# EAGLE board Main Board Schematic 2 v46 (EAGLE 9.7.0)
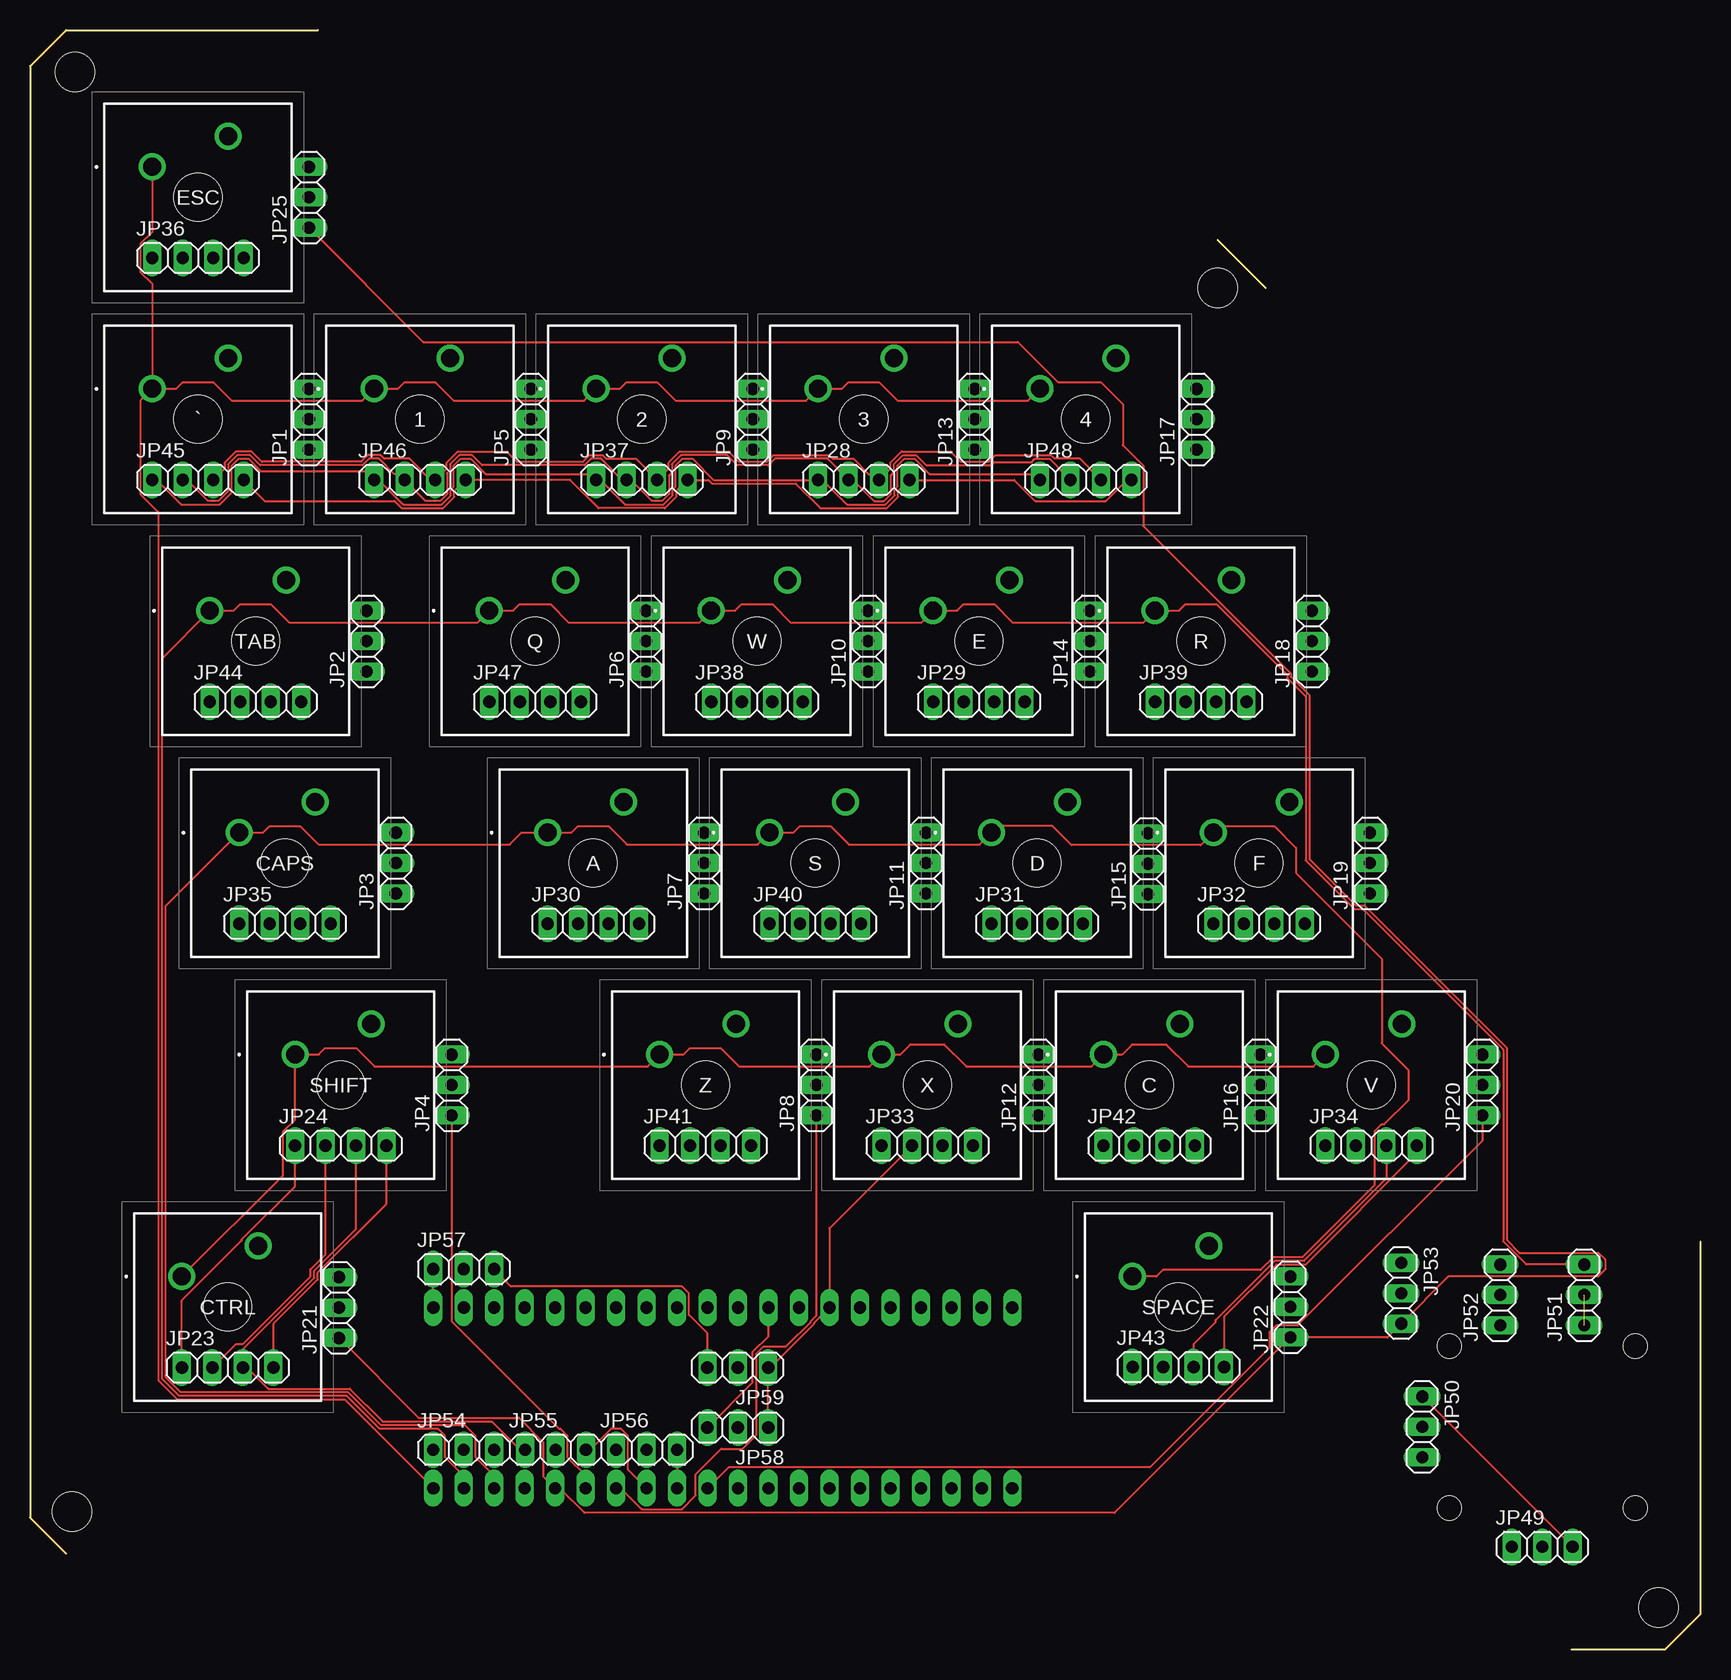
[diagram p0: board, top side]
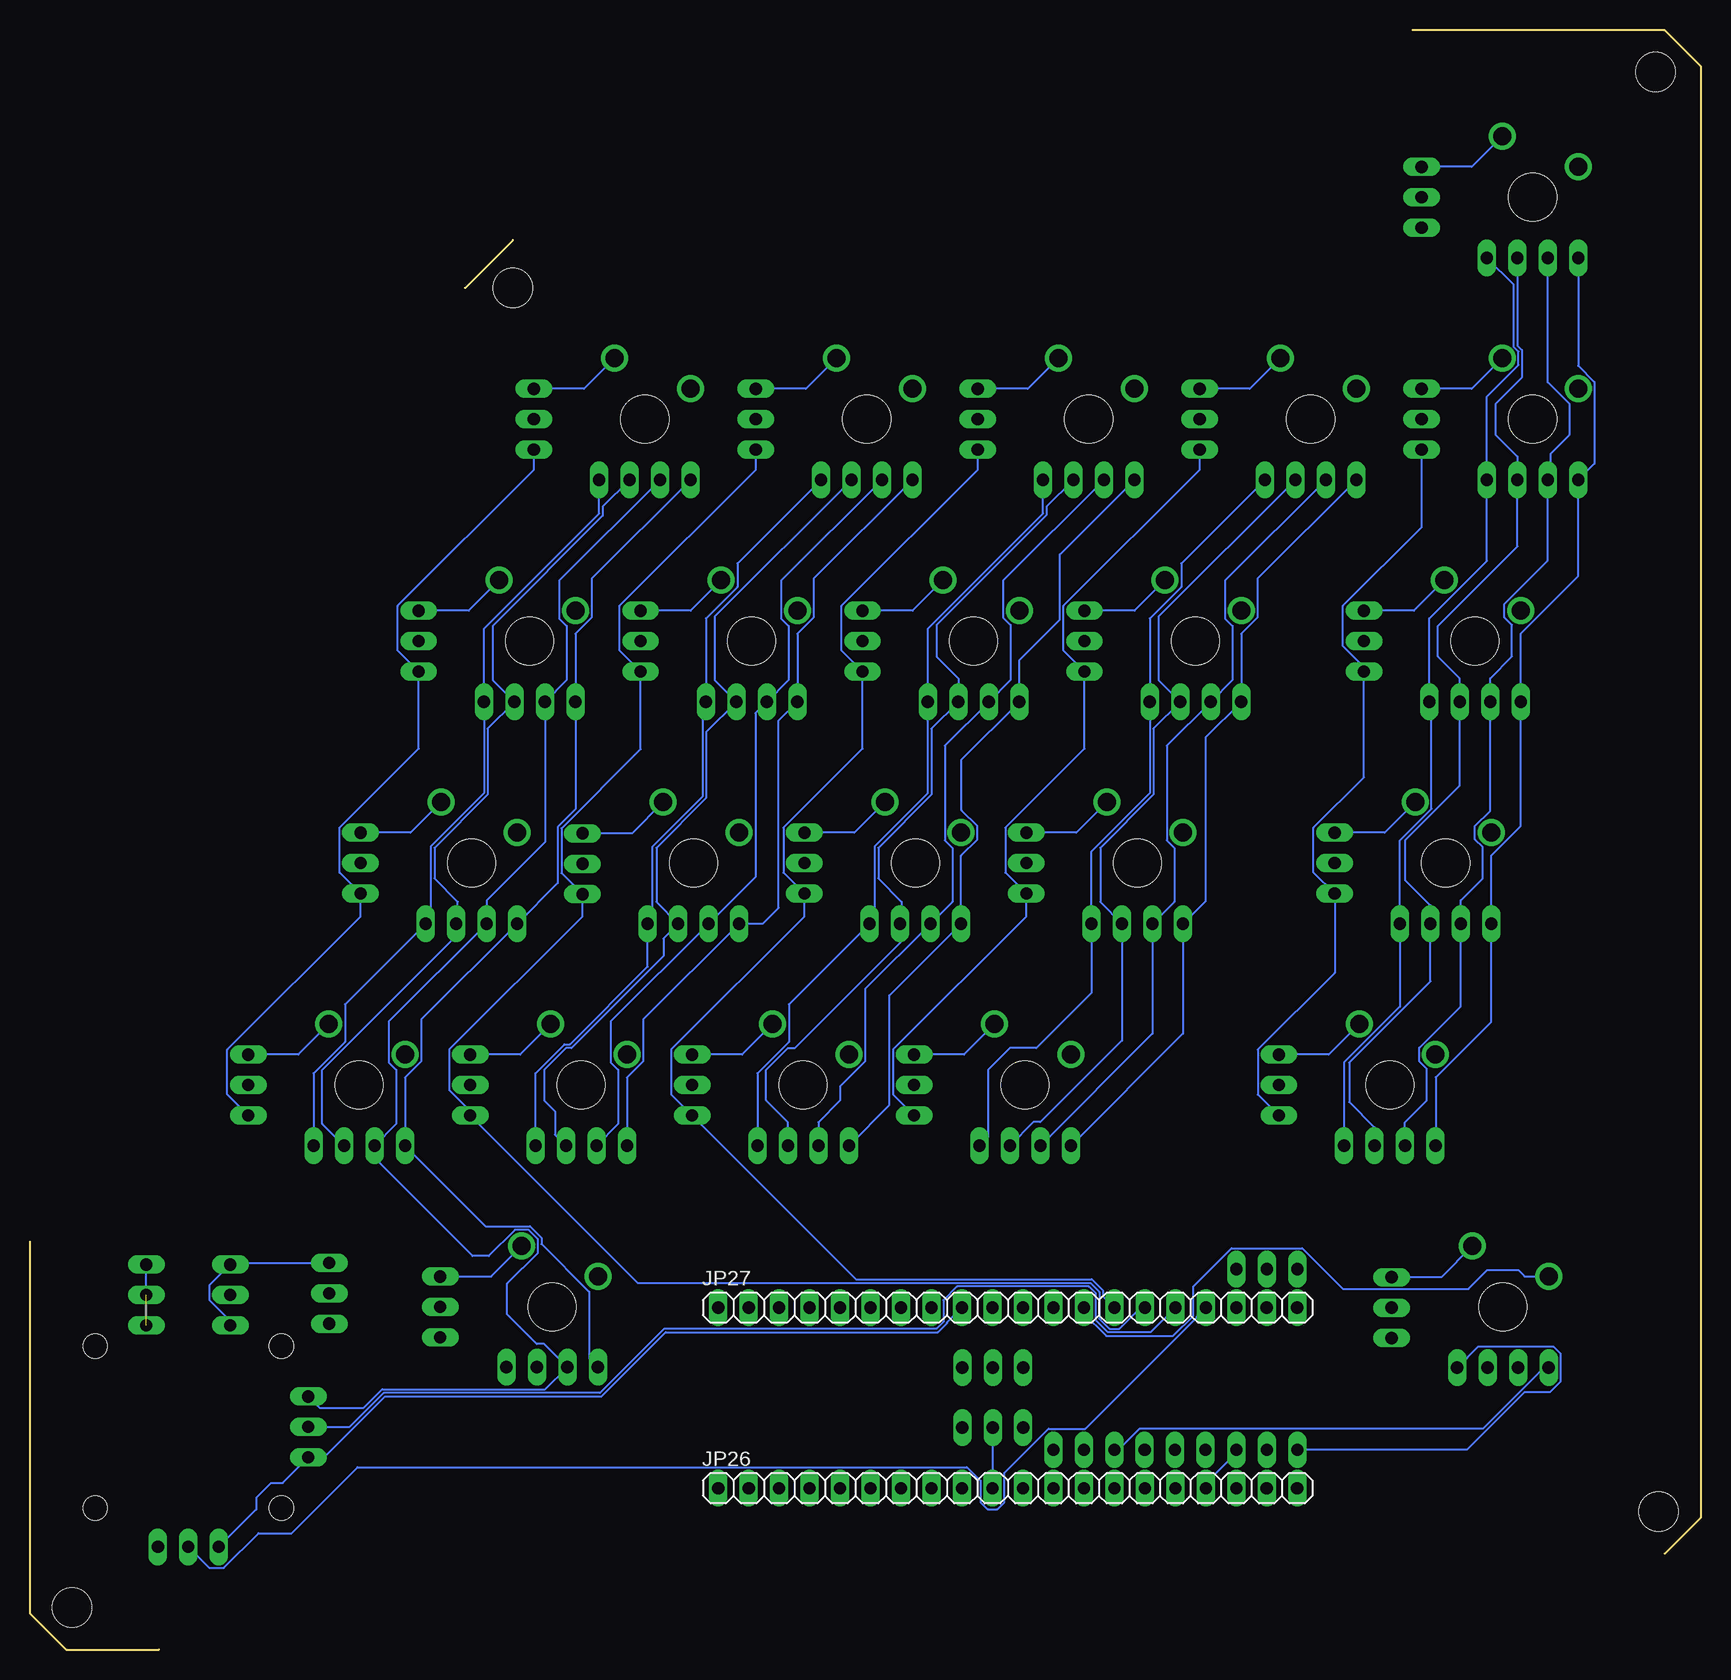
[diagram p1: board, bottom side, seen from below]

Size 139.25 x 135 mm. Coordinates in mm from the lower left corner, seen from the top.
Outline: 24,135 3,135 0,132 0,11 3,8
Outline: 103,113.5 99,117.5
Outline: 139.25,34 139.25,3 136.25,0 128.5,0
Copper layers (1*16): Top / Bottom
Stack-up Default Layer Stack: Top User Defined 0.035mm / Dielectric-1 User Defined 1.5mm / Bottom User Defined 0.035mm
Design rules "default": minimum track width 6mil, minimum drill 0.35mm, track to track 6mil, track to pad 6mil, pad to pad 6mil, via to via 6mil, smd to smd 6mil, copper to edge 40mil, drill to drill 6mil, minimum pad ring 10mil, minimum via ring 8mil, stop-mask expansion 4mil, vias tented up to drill 0mil, thermal gap 10mil
Holes 2 mm at 118.3,25.3 133.8,25.3 133.8,11.8 118.3,11.8
Holes 3.25 mm at 3.75,131.5 3.5,11.5 135.75,3.5 99,113.5

## Footprints (pad centres in the part's own frame; a part is rotated, then mirrored left to right if it is on the bottom)
MX1AE1NW = drill 1.499 pad 2.248: 1 0,0; 2 6.35,2.54 | hole 3.988: 3.81,-2.54
1X03 = drill 1.016 long: 1 -2.54,0; 2 0,0; 3 2.54,0
1X04 = drill 1.016 long: 1 -3.81,0; 2 -1.27,0; 3 1.27,0; 4 3.81,0
1X20 = drill 1.016 long: 1 -24.13,0; 2 -21.59,0; 3 -19.05,0; 4 -16.51,0; 5 -13.97,0; 6 -11.43,0; 7 -8.89,0; 8 -6.35,0; 9 -3.81,0; 10 -1.27,0; 11 1.27,0; 12 3.81,0; 13 6.35,0; 14 8.89,0; 15 11.43,0; 16 13.97,0; 17 16.51,0; 18 19.05,0; 19 21.59,0; 20 24.13,0

## Placement (x,y rotation side)
1  MX1A-E1NW  [MX1AE1NW]  28.69,105.09 0 top
2  MX1A-E1NW  [MX1AE1NW]  47.19,105.09 0 top
3  MX1A-E1NW  [MX1AE1NW]  65.69,105.09 0 top
4  MX1A-E1NW  [MX1AE1NW]  84.19,105.09 0 top
`  MX1A-E1NW  [MX1AE1NW]  10.19,105.09 0 top
A  MX1A-E1NW  [MX1AE1NW]  43.14,68.09 0 top
C  MX1A-E1NW  [MX1AE1NW]  89.49,49.59 0 top
CAPS  MX1A-E1NW  [MX1AE1NW]  17.44,68.09 0 top
CTRL  MX1A-E1NW  [MX1AE1NW]  12.66,31.09 0 top
D  MX1A-E1NW  [MX1AE1NW]  80.14,68.09 0 top
E  MX1A-E1NW  [MX1AE1NW]  75.29,86.59 0 top
ESC  MX1A-E1NW  [MX1AE1NW]  10.19,123.59 0 top
F  MX1A-E1NW  [MX1AE1NW]  98.64,68.09 0 top
JP1  PINHD-1X3  [1X03]  23.25,102.55 90 top
JP2  PINHD-1X3  [1X03]  28.05,84.05 90 top
JP3  PINHD-1X3  [1X03]  30.5,65.55 90 top
JP4  PINHD-1X3  [1X03]  35.15,47.05 90 top
JP5  PINHD-1X3  [1X03]  41.75,102.55 90 top
JP6  PINHD-1X3  [1X03]  51.35,84.05 90 top
JP7  PINHD-1X3  [1X03]  56.2,65.55 90 top
JP8  PINHD-1X3  [1X03]  65.55,47.05 90 top
JP9  PINHD-1X3  [1X03]  60.25,102.55 90 top
JP10  PINHD-1X3  [1X03]  69.85,84.05 90 top
JP11  PINHD-1X3  [1X03]  74.7,65.55 90 top
JP12  PINHD-1X3  [1X03]  84.05,47.05 90 top
JP13  PINHD-1X3  [1X03]  78.75,102.55 90 top
JP14  PINHD-1X3  [1X03]  88.35,84.05 90 top
JP15  PINHD-1X3  [1X03]  93.2,65.5 90 top
JP16  PINHD-1X3  [1X03]  102.55,47.05 90 top
JP17  PINHD-1X3  [1X03]  97.25,102.55 90 top
JP18  PINHD-1X3  [1X03]  106.85,84.05 90 top
JP19  PINHD-1X3  [1X03]  111.7,65.55 90 top
JP20  PINHD-1X3  [1X03]  121.05,47.05 90 top
JP21  PINHD-1X3  [1X03]  25.75,28.5 90 top
JP22  PINHD-1X3  [1X03]  105.05,28.55 90 top
JP23  PINHD-1X4  [1X04]  16.48,23.5 0 top
JP24  PINHD-1X4  [1X04]  25.9,42 0 top
JP25  PINHD-1X3  [1X03]  23.25,121.05 90 top
JP26  PINHD-1X20  [1X20]  57.75,13.45 0 bottom
JP27  PINHD-1X20  [1X20]  57.75,28.5 0 bottom
JP28  PINHD-1X4  [1X04]  69.5,97.5 0 top
JP29  PINHD-1X4  [1X04]  79.1,79 0 top
JP30  PINHD-1X4  [1X04]  46.95,60.5 0 top
JP31  PINHD-1X4  [1X04]  83.95,60.5 0 top
JP32  PINHD-1X4  [1X04]  102.45,60.5 0 top
JP33  PINHD-1X4  [1X04]  74.8,42 0 top
JP34  PINHD-1X4  [1X04]  111.8,42 0 top
JP35  PINHD-1X4  [1X04]  21.25,60.5 0 top
JP36  PINHD-1X4  [1X04]  14,116 0 top
JP37  PINHD-1X4  [1X04]  51,97.5 0 top
JP38  PINHD-1X4  [1X04]  60.6,79 0 top
JP39  PINHD-1X4  [1X04]  97.6,79 0 top
JP40  PINHD-1X4  [1X04]  65.45,60.5 0 top
JP41  PINHD-1X4  [1X04]  56.3,42 0 top
JP42  PINHD-1X4  [1X04]  93.3,42 0 top
JP43  PINHD-1X4  [1X04]  95.72,23.54 0 top
JP44  PINHD-1X4  [1X04]  18.8,79 0 top
JP45  PINHD-1X4  [1X04]  14,97.5 0 top
JP46  PINHD-1X4  [1X04]  32.5,97.5 0 top
JP47  PINHD-1X4  [1X04]  42.1,79 0 top
JP48  PINHD-1X4  [1X04]  88,97.5 0 top
JP49  PINHD-1X3  [1X03]  126.05,8.55 0 top
JP50  PINHD-1X3  [1X03]  116.05,18.55 270 top
JP51  PINHD-1X3  [1X03]  129.55,29.55 90 top
JP52  PINHD-1X3  [1X03]  122.55,29.55 90 top
JP53  PINHD-1X3  [1X03]  114.3,29.7 270 top
JP54  PINHD-1X3  [1X03]  36.15,16.65 0 top
JP55  PINHD-1X3  [1X03]  43.8,16.65 0 top
JP56  PINHD-1X3  [1X03]  51.4,16.65 0 top
JP57  PINHD-1X3  [1X03]  36.15,31.7 0 top
JP58  PINHD-1X3  [1X03]  59,18.5 180 top
JP59  PINHD-1X3  [1X03]  59,23.5 180 top
Q  MX1A-E1NW  [MX1AE1NW]  38.29,86.59 0 top
R  MX1A-E1NW  [MX1AE1NW]  93.79,86.59 0 top
S  MX1A-E1NW  [MX1AE1NW]  61.64,68.09 0 top
SHIFT  MX1A-E1NW  [MX1AE1NW]  22.09,49.59 0 top
SPACE  MX1A-E1NW  [MX1AE1NW]  91.92,31.09 0 top
TAB  MX1A-E1NW  [MX1AE1NW]  14.99,86.59 0 top
V  MX1A-E1NW  [MX1AE1NW]  107.99,49.59 0 top
W  MX1A-E1NW  [MX1AE1NW]  56.79,86.59 0 top
X  MX1A-E1NW  [MX1AE1NW]  70.99,49.59 0 top
Z  MX1A-E1NW  [MX1AE1NW]  52.49,49.59 0 top

## Library data of the parts
1-4 ` A C CAPS CTRL D E ESC F Q R S SHIFT SPACE TAB V W X Z = SamacSys_Parts; DESCRIPTION: Pushbutton Switches Full Travel, Mech. Keyswitch, Click Tactile Feel (Blue stem), 60cN, No LED, No Diode, Fixation Pins for PCB Mounting; HEIGHT: 15.2mm; MANUFACTURER_NAME: Cherry; MANUFACTURER_PART_NUMBER: MX1A-E1NW; MOUSER_PART_NUMBER: 540-MX1A-E1NW; MOUSER_PRICE-STOCK: https://www.mouser.co.uk/ProductDetail/CHERRY/MX1A-E1NW/?qs=Z7NFYKyvgJd45Wm4xzFv7w%3D%3D
JP1-JP59 = Connector; CATEGORY: CONNECTOR; SUB-CATEGORY: PIN-HEADER

## Nets
N$1: `.2 JP1.3
N$2: JP2.3 TAB.2
N$3: CAPS.2 JP3.3
N$4: JP4.3 SHIFT.2
N$5: 1.2 JP5.3
N$6: JP6.3 Q.2
N$7: A.2 JP7.3
N$8: JP8.3 Z.2
N$9: 2.2 JP9.3
N$10: JP10.3 W.2
N$11: JP11.3 S.2
N$12: JP12.3 X.2
N$13: 3.2 JP13.3
N$14: E.2 JP14.3
N$15: D.2 JP15.3
N$16: C.2 JP16.3
N$17: 4.2 JP17.3
N$18: JP18.3 R.2
N$19: F.2 JP19.3
N$20: JP20.3 V.2
N$21: CTRL.2 JP21.3
N$22: JP22.3 SPACE.2
N$23: C.1 CTRL.1 JP27.13 SHIFT.1 V.1 X.1 Z.1
N$24: A.1 CAPS.1 D.1 F.1 JP26.18 S.1 SPACE.1
N$25: ESC.2 JP25.3
N$26: E.1 JP26.19 JP51.1 JP51.2 JP51.3 Q.1 R.1 TAB.1 W.1
N$27: 1.1 2.1 3.1 4.1 `.1 ESC.1 JP26.20
N$28: JP23.2 JP24.2 JP27.7 JP28.2 JP29.2 JP30.2 JP31.2 JP32.2 JP33.2 JP34.2 JP35.2 JP36.2 JP37.2 JP38.2 JP39.2 JP40.2 JP41.2 JP42.2 JP43.2 JP44.2 JP45.2 JP46.2 JP47.2 JP48.2 JP49.3 JP50.1 JP58.1 JP59.1
N$29: JP1.1 JP2.1 JP3.1 JP4.1 JP26.15
N$30: JP9.1 JP10.1 JP11.1 JP12.1 JP27.14
N$31: JP13.1 JP14.1 JP15.1 JP16.1 JP27.15
N$32: JP17.1 JP18.1 JP19.1 JP20.1 JP26.11
N$33: JP21.1 JP22.1 JP25.1 JP26.16 JP53.3
N$34: JP52.1 JP52.3 JP53.1
N$37: JP23.4 JP24.4 JP28.4 JP29.4 JP30.4 JP31.4 JP32.4 JP33.4 JP34.4 JP35.4 JP36.4 JP37.4 JP38.4 JP39.4 JP40.4 JP41.4 JP42.4 JP43.4 JP44.4 JP45.4 JP46.4 JP47.4 JP48.4 JP54.1
N$38: JP26.17 JP54.3
N$40: JP26.13 JP55.3
N$41: JP5.1 JP6.1 JP7.1 JP8.1 JP26.14
N$42: JP26.12 JP56.3
N$43: JP23.3 JP24.3 JP28.3 JP29.3 JP30.3 JP31.3 JP32.3 JP33.3 JP34.3 JP35.3 JP36.3 JP37.3 JP38.3 JP39.3 JP40.3 JP41.3 JP42.3 JP43.3 JP44.3 JP45.3 JP46.3 JP47.3 JP48.3 JP55.1
N$44: JP23.1 JP24.1 JP28.1 JP29.1 JP30.1 JP31.1 JP32.1 JP33.1 JP34.1 JP35.1 JP36.1 JP37.1 JP38.1 JP39.1 JP40.1 JP41.1 JP42.1 JP43.1 JP44.1 JP45.1 JP46.1 JP47.1 JP48.1 JP56.1
N$58: JP27.20 JP57.1
N$59: JP57.3 JP59.3
N$61: JP26.10 JP58.2
N$62: JP27.16 JP50.2
N$63: JP27.17 JP49.2
N$65: JP27.9 JP49.1 JP50.3 JP58.3

## Tracks (layer width: path | path; a pad name or v marks a point on that pad's centre or on a via)
N$1
  Bottom 0.152: `.2 19.08,105.09 JP1.3
N$2
  Bottom 0.152: TAB.2 23.88,86.59 JP2.3
N$3
  Bottom 0.152: CAPS.2 26.33,68.09 JP3.3
N$4
  Bottom 0.152: SHIFT.2 30.98,49.59 JP4.3
N$5
  Bottom 0.152: 1.2 37.58,105.09 JP5.3
N$6
  Bottom 0.152: Q.2 47.18,86.59 JP6.3
N$7
  Bottom 0.152: A.2 52.03,68.09 JP7.3
N$8
  Bottom 0.152: Z.2 61.38,49.59 JP8.3
N$9
  Bottom 0.152: 2.2 56.08,105.09 JP9.3
N$10
  Bottom 0.152: W.2 65.68,86.59 JP10.3
N$11
  Bottom 0.152: S.2 70.53,68.09 JP11.3
N$12
  Bottom 0.152: X.2 79.88,49.59 JP12.3
N$13
  Bottom 0.152: 3.2 74.58,105.09 JP13.3
N$14
  Bottom 0.152: E.2 84.18,86.59 JP14.3
N$15
  Bottom 0.152: D.2 89.08,68.04 JP15.3
N$16
  Bottom 0.152: C.2 98.38,49.59 JP16.3
N$17
  Bottom 0.152: 4.2 93.08,105.09 JP17.3
N$18
  Bottom 0.152: R.2 102.68,86.59 JP18.3
N$19
  Bottom 0.152: F.2 107.53,68.09 JP19.3
N$20
  Bottom 0.152: V.2 116.88,49.59 JP20.3
N$21
  Bottom 0.152: CTRL.2 21.61,31.04 JP21.3
N$22
  Bottom 0.152: SPACE.2 100.81,31.09 JP22.3
N$23
  Top 0.152: V.1 107,48.6 96.55,48.6 94.7,50.44 91.89,50.44 91.05,49.59 C.1 88.5,48.6 78.05,48.6 76.2,50.44 73.39,50.44 72.55,49.59 X.1 70,48.6 59.11,48.6 57.58,50.14 55.02,50.14 54.48,49.59 Z.1 51.5,48.6 28.72,48.6 27.18,50.14 24.62,50.14 24.08,49.59 SHIFT.1 22.09,44.16 21.1,43.17 21.1,39.52 CTRL.1
  Bottom 0.152: CTRL.1 14.65,31.09 15.2,31.64 17.75,31.64 19.34,30.05 29.8,30.05 33.2,33.45 39.1,33.45 42.29,30.26 42.29,27.83 43.98,26.14 49.52,26.14 51.46,28.08 51.46,28.44 JP27.13
N$24
  Top 0.152: SPACE.1 93.9,31.09 94.45,31.64 102.57,31.64 103.62,32.69 106.06,32.69 112.08,38.71 112.08,43.17 112.66,43.75 112.87,43.75 114.89,45.77 114.89,48.33 112.68,50.53 112.68,57.58 105.54,64.73 105.54,66.83 103.73,68.64 99.22,68.64 98.68,68.09 F.1 97.6,67.05 86.81,67.05 85.23,68.64 80.72,68.64 80.18,68.09 D.1 79.15,67.1 68.27,67.1 66.73,68.64 64.17,68.64 63.63,68.09 S.1 60.65,67.1 49.77,67.1 48.23,68.64 45.67,68.64 45.13,68.09 A.1 40.99,68.09 40,67.1 24.06,67.1 22.53,68.64 19.97,68.64 19.43,68.09 CAPS.1 11.31,61.96 11.31,22.69 12.56,21.44 26.52,21.44 29.26,18.71 36.26,18.71 37.14,17.82 37.14,16.04 38.7,14.48 JP26.18
N$25
  Bottom 0.152: ESC.2 19.08,123.59 JP25.3
N$26  (1 unrouted)
  Top 0.152: JP26.19 36.16,14.48 34.6,16.04 34.6,17.82 34.02,18.4 29.13,18.4 26.39,21.14 12.43,21.14 11.01,22.56 11.01,82.61 TAB.1 16.98,86.59 17.52,87.14 20.08,87.14 21.61,85.6 37.3,85.6 Q.1 40.28,86.59 40.82,87.14 43.38,87.14 44.91,85.6 55.8,85.6 W.1 58.78,86.59 59.32,87.14 61.88,87.14 63.42,85.6 74.3,85.6 E.1 77.28,86.59 77.82,87.14 80.38,87.14 81.92,85.6 92.8,85.6 R.1 95.78,86.59 96.32,87.14 98.88,87.14 104.79,81.22 104.79,80.97 106.34,79.42 106.34,65.77 110.4,61.72 111.09,61.72 122.8,50 122.8,34 124.71,32.09 JP51.3
  Bottom 0.152: JP51.1 JP51.3
N$27
  Top 0.152: `.1 12.18,105.09 12.72,105.64 15.28,105.64 16.82,104.1 27.7,104.1 1.1 30.68,105.09 31.22,105.64 33.78,105.64 35.31,104.1 46.2,104.1 2.1 49.18,105.09 49.72,105.64 52.28,105.64 53.81,104.1 64.7,104.1 3.1 67.68,105.09 68.22,105.64 70.78,105.64 72.31,104.1 83.2,104.1 4.1 | ESC.1 10.19,118.16 9.2,117.17 9.2,114.83 10.19,113.84 `.1 | `.1 9.2,104.1 9.2,96.33 10.7,94.82 10.7,22.44 12.31,20.83 26.27,20.83 33.62,13.48 JP26.20
N$28
  Top 0.152: JP23.2 17.17,25.46 17.75,25.46 23.39,31.1 23.39,31.7 24.63,32.95 JP24.2 | JP33.2 66.64,35.11 JP27.7 65.39,27.26 65.39,27.2 61.69,23.5 JP59.1 JP58.1 | JP45.2 13.11,97.5 14.86,95.75 15.68,95.75 16.52,96.58 16.52,98.8 17.27,99.56 18.35,99.56 19.19,98.72 27.74,98.72 28.28,99.25 29.1,99.25 30.35,98 30.73,98 JP46.2 32.98,95.75 34.18,95.75 34.76,96.33 34.76,98.06 35.02,98.31 35.02,98.8 35.77,99.56 36.85,99.56 37.69,98.72 46.24,98.72 46.78,99.25 47.6,99.25 49.35,97.5 JP37.2 50.11,97.5 51.86,95.75 52.68,95.75 53.26,96.33 53.26,97.87 53.52,98.13 53.52,98.8 54.27,99.56 58.11,99.56 58.95,98.72 61.55,98.72 62.09,99.25 66.48,99.25 JP28.2 68.61,97.5 70.36,95.75 71.18,95.75 71.76,96.33 71.76,97.87 72.02,98.13 72.02,98.8 72.77,99.56 73.85,99.56 74.69,98.72 80.05,98.72 80.33,99 83.53,99 83.78,99.25 84.98,99.25 JP48.2 | 115.96,21 JP50.1 JP49.3
  Bottom 0.152: JP36.2 12.73,105.64 10.91,103.83 10.91,101.27 12.5,99.69 12.5,97.73 JP45.2 12.73,90.76 16.34,87.15 16.34,86.03 15.71,85.4 15.71,82.77 17.53,80.96 JP44.2 17.53,69.91 18.79,68.65 18.79,67.53 18.16,66.9 18.16,64.27 19.98,62.46 JP35.2 19.98,53.61 23.44,50.15 23.44,49.03 22.81,48.4 22.81,45.77 24.63,43.96 JP24.2 | JP46.2 39.64,89.09 39.64,85.96 39.01,85.33 39.01,80.82 JP47.2 44.49,75.34 44.49,67.46 43.86,66.83 43.86,62.32 JP30.2 45.68,51.35 JP41.2 | JP33.2 73.53,43.96 71.71,45.77 71.71,46.95 69.64,49.03 69.64,55.04 JP40.2 62.36,62.32 62.36,66.83 62.99,67.46 62.99,75.34 JP38.2 57.51,80.82 57.51,85.4 58.14,86.03 58.14,89.09 JP37.2 | JP28.2 76.64,89.09 76.64,85.96 76.01,85.33 76.01,80.82 JP29.2 78.79,78.04 78.79,64.39 JP31.2 90.84,52.34 90.84,48.96 90.21,48.33 90.21,43.82 JP42.2 | JP48.2 95.14,89.09 95.14,85.96 94.51,85.33 94.51,80.82 JP39.2 96.33,67.31 101.18,62.46 JP32.2 109.34,52.34 109.34,48.96 108.71,48.33 108.71,43.82 JP34.2 110.53,40.98 102.36,32.81 101,32.81 98.83,34.98 97.7,34.98 96.91,34.19 96.91,33.07 99.46,30.52 99.46,27.92 97,25.46 96.38,25.46 JP43.2 96.3,21.7 109.89,21.7 111.44,20.15 115.11,20.15 JP50.1
N$29
  Top 0.152: JP26.15 46.32,14.51 44.79,16.04 44.79,17.82 44.21,18.4 44.09,18.4 35.15,27.35 JP4.1
  Bottom 0.152: JP4.1 36.9,46.26 36.9,50 30.5,56.4 JP3.1 32.25,64.76 32.25,68.5 28.05,72.7 JP2.1 28.05,81.89 29.8,83.64 29.8,87 23.25,93.55 JP1.1
N$30
  Bottom 0.152: JP27.14 49.8,29.44 49.8,29.92 50.74,30.86 70.4,30.86 JP12.1 85.8,46.26 85.8,50 74.7,61.1 JP11.1 76.45,64.76 76.45,68.5 69.85,75.1 JP10.1 71.6,83.26 71.6,87 60.25,98.35 JP9.1
N$31
  Bottom 0.152: JP27.15 46.7,28.5 48.45,26.75 49.27,26.75 50.1,27.58 50.1,29.8 50.86,30.56 88.6,30.56 JP16.1 102.55,44.89 104.3,46.64 104.3,50 93.2,61.1 JP15.1 94.95,64.71 94.95,68.45 88.35,75.05 JP14.1 90.1,83.26 90.1,87 78.75,98.35 JP13.1
N$32
  Top 0.152: JP26.11 58.23,15.2 93.36,15.2 103.3,25.14 103.3,26.42 103.88,27 105.66,27 121.05,42.39 JP20.1
  Bottom 0.152: JP20.1 122.8,46.26 122.8,50 111.7,61.1 JP19.1 113.45,64.76 113.45,68.5 106.85,75.1 JP18.1 108.6,83.26 108.6,87 97.25,98.35 JP17.1
N$33
  Top 0.152: JP25.1 32.78,108.98 82.35,108.98 85.7,105.64 89.28,105.64 91.09,103.83 91.09,100.39 92.8,98.67 92.8,93.64 105.1,81.35 105.1,81.1 106.65,79.55 106.65,65.9 110.53,62.02 111.22,62.02 123.11,50.13 123.11,34.13 124.15,33.08 130.72,33.08 131.3,32.5 131.3,31.68 130.72,31.1 118.24,31.1 JP53.3 113.15,26.01 JP22.1 105.03,26.01 90.41,11.39 46.21,11.39 44.16,13.45 JP26.16 42.79,14.44 42.79,17.28 40.76,19.32 32.39,19.32 JP21.1
N$34
  Bottom 0.152: JP53.1 122.4,32.24 JP52.3 124.3,30.34 124.3,29.14 122.55,27.39 JP52.1
N$37
  Top 0.152: JP24.4 29.71,37.16 24,31.45 24,30.85 20.29,27.13 JP23.4 | JP45.4 19.56,95.75 30.39,95.75 31,95.14 34.43,95.14 35.37,96.08 35.37,96.56 JP46.4 45.03,97.5 47.39,95.14 52.93,95.14 53.87,96.08 53.87,96.56 JP37.4 56.54,97.5 56.85,97.19 63.83,97.19 65.89,95.14 71.43,95.14 72.37,96.08 72.37,96.56 JP28.4 82.03,97.5 83.78,95.75 89.68,95.75 91.43,97.5 JP48.4 | JP34.4 115.62,41.98 115.62,41.39 106.32,32.08 103.88,32.08 99.53,27.74 JP43.4
  Bottom 0.152: JP24.4 29.71,48.95 25.06,53.6 JP35.4 25.06,67.45 22.44,70.07 22.44,78.69 22.61,78.86 JP44.4 22.61,85.95 17.81,90.75 JP45.4 17.81,104.45 15.19,107.07 15.19,108.19 15.57,108.58 15.57,113.76 JP36.4 | JP46.4 43.29,90.52 43.29,88.57 45.91,85.95 JP47.4 45.91,71.39 50.76,66.53 JP30.4 50.76,54.74 55.36,50.14 57.58,50.14 59.39,48.33 59.39,42.72 JP41.4 | JP33.4 78.61,48.03 75.99,50.66 75.99,53.77 JP40.4 68.84,60.92 68.84,66.95 64.41,71.39 JP38.4 64.41,85.09 54.81,94.69 JP37.4 | JP28.4 80.29,90.52 80.29,88.57 82.91,85.95 JP29.4 83.19,78.72 83.19,71.11 87.34,66.95 87.34,60.92 JP31.4 87.76,56.93 94.25,50.44 94.7,50.44 97.11,48.03 JP42.4 | JP48.4 91.81,94.69 101.41,85.09 JP39.4 101.41,71.39 105.84,66.95 105.84,60.92 JP32.4 112.99,53.77 112.99,50.66 115.61,48.03 JP34.4 | JP23.4 18.53,25.25 12.25,25.25 11.67,24.67 11.67,22.33 12.56,21.44 14.67,21.44 19.46,16.65 JP54.1
N$38
  Bottom 0.152: JP26.17 41.24,13.85 38.69,16.4 JP54.3
N$40
  Top 0.152: JP55.3 46.7,16.65 48.45,18.4 49.27,18.4 49.85,17.82 49.85,15 JP26.13
N$41
  Top 0.152: JP26.14 49.24,13.45 50.99,11.7 54.35,11.7 55.49,12.84 55.49,14.62 57.61,16.75 59.41,16.75 60.55,17.89 60.55,24.67 61.13,25.25 63.02,25.25 65.09,27.33 65.09,27.38 65.55,27.84 JP8.1
  Bottom 0.152: JP8.1 67.3,46.26 67.3,50 56.2,61.1 JP7.1 57.95,64.76 57.95,68.5 51.35,75.1 JP6.1 53.1,83.26 53.1,87 41.75,98.35 JP5.1
N$42
  Top 0.152: JP56.3 JP26.12
N$43
  Top 0.152: JP24.3 27.17,35.05 23.69,31.58 23.69,30.97 17.75,25.02 JP23.3 18.12,23.5 19.88,21.75 26.65,21.75 29.38,19.01 38.49,19.01 40.85,16.65 JP55.1 | JP45.3 16.21,98.44 16.21,98.92 17.15,99.86 18.47,99.86 19.32,99.02 27.62,99.02 28.15,99.56 29.23,99.56 29.53,99.25 31.64,99.25 33.39,97.5 JP46.3 34.71,98.44 34.71,98.92 35.65,99.86 39.73,99.86 40.58,99.02 46.12,99.02 46.65,99.56 47.73,99.56 48.03,99.25 50.52,99.25 JP37.3 53.21,98.44 53.21,98.92 54.15,99.86 58.23,99.86 59.08,99.02 61.42,99.02 61.96,99.56 66.6,99.56 66.91,99.25 68.64,99.25 69.89,98 70.27,98 JP28.3 71.71,98.44 71.71,98.92 72.65,99.86 76.73,99.86 77.58,99.02 79.92,99.02 80.46,99.56 85.1,99.56 85.36,99.31 87.47,99.31 JP48.3 | JP34.3 113.07,39.27 106.19,32.38 103.75,32.38 98.81,27.45 98.81,27.27 97,25.45 JP43.3
  Bottom 0.152: JP24.3 27.17,43.52 29.29,45.65 29.29,48.94 22.52,55.71 JP35.3 22.52,62.03 24.64,64.14 24.64,67.44 20.07,72.01 JP44.3 20.07,80.96 21.89,82.77 21.89,85.33 15.27,91.94 JP45.3 15.27,99.46 17.09,101.27 17.09,103.83 14.88,106.03 14.88,108.32 15.27,108.7 JP36.3 | JP46.3 45.19,86.08 45.19,80.82 JP47.3 45.6,76.77 45.6,71.26 50.04,66.83 50.04,62.32 JP30.3 48.22,50.77 55.02,43.96 55.61,43.96 JP41.3 | JP33.3 76.07,43.96 77.89,45.77 77.89,48.33 76.08,50.14 75.5,50.14 66.72,58.92 JP40.3 66.59,60.63 66.59,62.32 68.54,64.27 68.54,66.83 64.11,71.26 64.11,76.77 JP38.3 61.87,80.96 63.69,82.77 63.69,85.38 54.5,94.56 54.5,95.27 JP37.3 | JP28.3 82.19,86.08 82.19,80.82 JP29.3 82.88,76.49 82.88,70.98 87.04,66.83 87.04,62.32 JP31.3 | 85.66,60.94 JP31.3 | JP42.3 95.48,42.91 95.48,44.87 96.39,45.77 96.39,48.33 94.58,50.14 94.12,50.14 86.45,57.81 86.45,59.27 JP31.3 | JP48.3 91.5,95.27 91.5,94.51 100.69,85.33 100.69,80.82 JP39.3 101.11,76.77 101.11,71.26 105.54,66.83 105.54,64.27 103.59,62.32 103.59,60.63 JP32.3 103.72,59.49 114.89,48.33 114.89,43.82 JP34.3
N$44
  Top 0.152: JP23.1 12.66,29.1 17.66,34.1 17.66,34.19 22.09,38.62 JP24.1 | JP45.1 10.57,97.5 12.62,95.44 15.81,95.44 16.82,96.45 16.82,98.67 17.4,99.25 18.22,99.25 19.22,98.25 27.94,98.25 JP46.1 29.07,97.5 31.12,95.44 34.31,95.44 35.06,96.2 35.06,96.69 35.32,96.94 35.32,98.67 35.9,99.25 36.72,99.25 37.97,98 46.69,98 JP37.1 47.57,97.5 49.62,95.44 52.81,95.44 53.56,96.2 53.56,96.69 53.82,96.94 53.82,98.67 54.4,99.25 55.22,99.25 56.97,97.5 JP28.1 66.07,97.5 68.12,95.44 71.31,95.44 72.06,96.2 72.06,96.69 72.32,96.94 72.32,98.67 72.9,99.25 73.72,99.25 74.97,98 83.69,98 JP48.1
  Bottom 0.152: JP36.1 10.19,107 8.84,105.65 8.84,98.85 JP45.1 10.19,89.48 14.99,84.68 JP44.1 14.99,68.63 17.44,66.18 JP35.1 17.44,52.33 22.06,47.7 22.06,42.03 JP24.1 | JP46.1 36.94,89.25 36.94,86.03 38.29,84.68 JP47.1 41.24,76.05 41.24,62.4 JP30.1 43.14,51.35 JP41.1 | JP33.1 67.61,45.38 67.61,54.53 JP40.1 61.64,66.18 60.29,67.53 60.29,68.65 61.59,69.95 61.59,74.2 JP38.1 56.79,82.46 53.41,85.84 53.41,91.28 JP37.1 | JP28.1 73.94,89.25 73.94,86.03 75.29,84.68 JP29.1 76.84,77.45 76.84,61.83 78.17,60.5 JP31.1 88.14,52.5 88.14,49.03 89.49,47.68 JP42.1 | JP48.1 92.44,89.25 92.44,86.03 93.79,84.68 JP39.1 93.79,70.04 95.26,68.58 95.26,63.88 JP32.1 106.64,52.5 106.64,49.03 107.99,47.68 JP34.1 101.28,35.29 97.58,35.29 96.61,34.32 96.61,33.8 92.64,29.83 92.64,24.26 JP43.1 | JP23.1 13.04,23.5 18.14,18.4 46.75,18.4 48.5,16.65 JP56.1
N$58
  Top 0.152: JP57.1 JP27.20
N$59
  Top 0.152: JP59.3 56.46,26.36 54.93,27.89 54.93,29.67 54.35,30.25 40.06,30.25 38.69,31.63 JP57.3
N$61
  Bottom 0.152: JP58.2 59.02,18.48 JP26.10
N$62
  Bottom 0.152: JP50.2 112.61,18.55 109.76,21.39 91.75,21.39 86.39,26.75 63.69,26.75 63.11,27.33 63.11,29.11 61.97,30.25 50.99,30.25 50.41,29.67 50.41,27.45 49.4,26.44 45.84,26.44 JP27.16
N$63
  Bottom 0.152: JP27.17 41.98,27.76 41.98,27.7 51.28,18.4 54.35,18.4 58.03,14.72 58.03,12.28 58.61,11.7 59.43,11.7 60.01,12.28 60.01,14.06 61.15,15.2 111.94,15.2 117.43,9.71 120.19,9.71 123.1,6.8 124.3,6.8 JP49.2
N$65
  Top 0.152: JP58.3 60.25,22.28 60.25,24.8 61.56,26.11 JP27.9
  Bottom 0.152: JP27.9 62.81,27.26 62.81,27.2 63.56,26.44 86.27,26.44 91.62,21.09 109.64,21.09 114.72,16.01 JP50.3 118.17,13.89 119.17,13.89 120.39,12.67 120.39,11.67 JP49.1